# EAGLE board L298BOB (EAGLE 6.1)
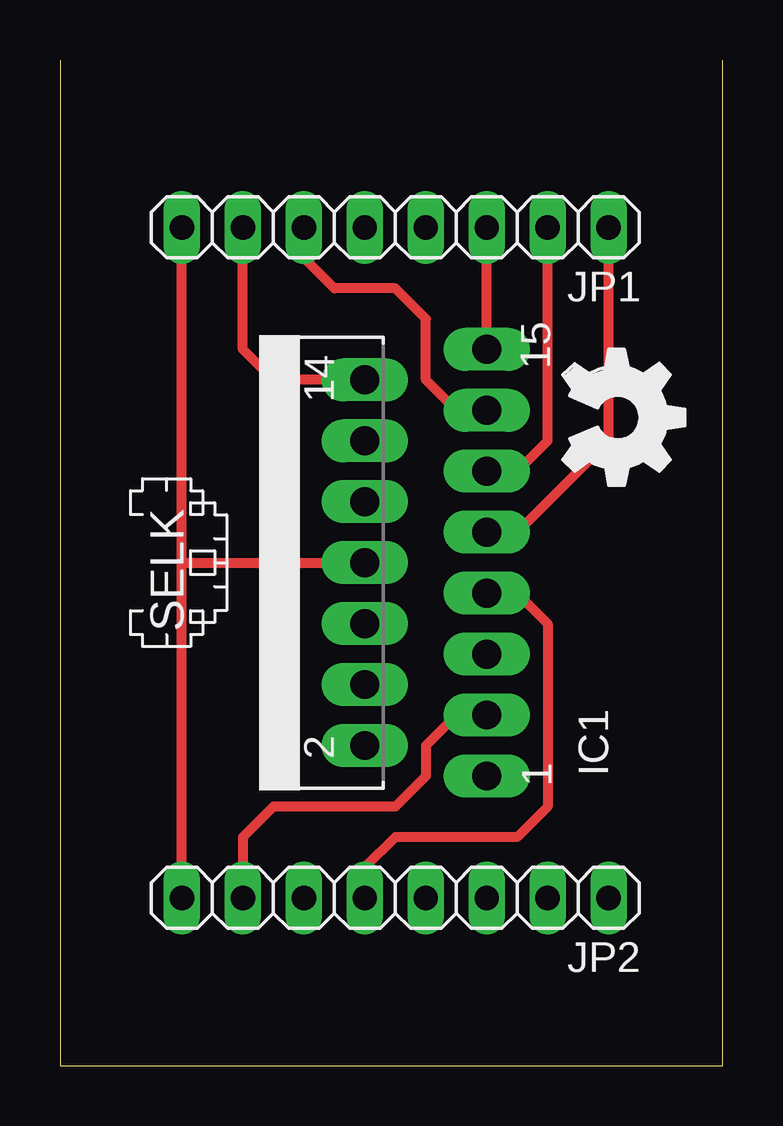
[diagram p0: board, top side]
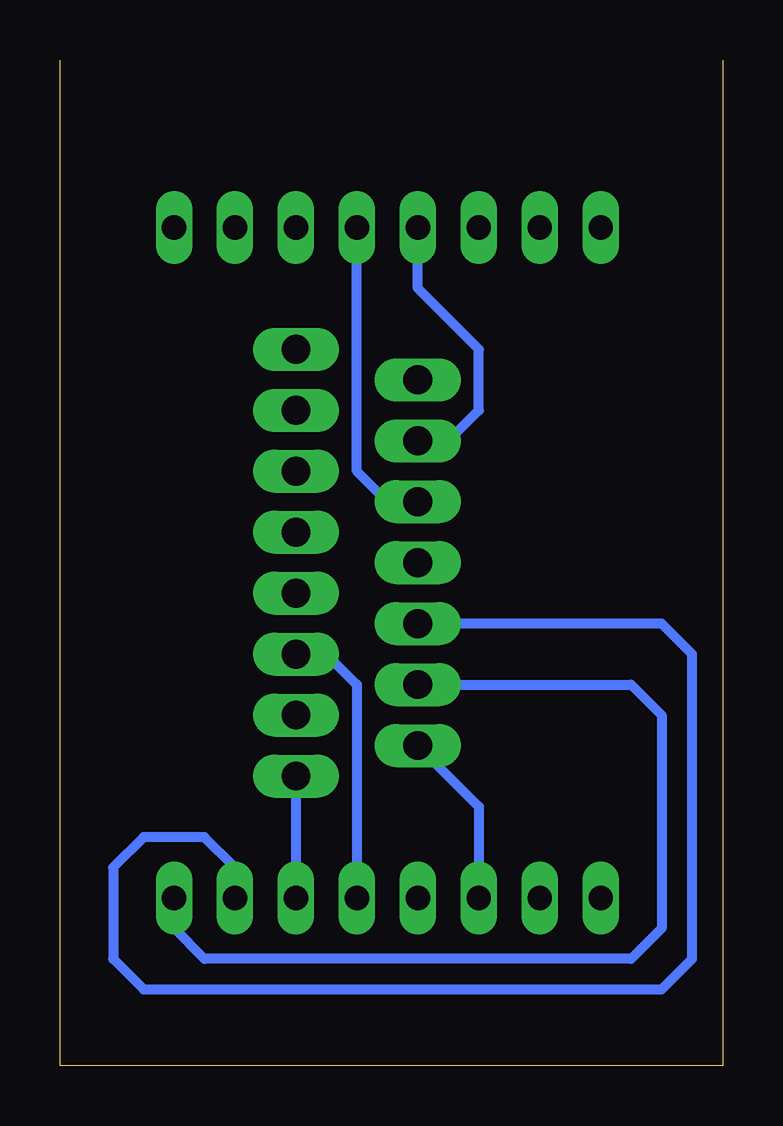
[diagram p1: board, bottom side, seen from below]

Size 27.61 x 41.9 mm. Coordinates in mm from the lower left corner, seen from the top.
Outline: 27.61,41.9 27.61,0 0,0 0,41.9
Copper layers (1*16): Top 0.035mm / dielectric 1.5mm / Bottom 0.035mm
Design rules: minimum track width 16mil, minimum drill 24mil, track to track 16mil, track to pad 16mil, pad to pad 8mil, via to via 8mil, smd to smd 8mil, copper to edge 40mil, drill to drill 8mil, minimum pad ring 10mil, minimum via ring 8mil, stop-mask expansion 4mil, vias tented up to drill 0mil, thermal gap 10mil

## Footprints (pad centres in the part's own frame; a part is rotated, then mirrored left to right if it is on the bottom)
MULTIWATT-15 = drill 1.2 long: 1 -8.89,-7.62; 2 -7.62,-2.54; 3 -6.35,-7.62; 4 -5.08,-2.54; 5 -3.81,-7.62; 6 -2.54,-2.54; 7 -1.27,-7.62; 8 0,-2.54; 9 1.27,-7.62; 10 2.54,-2.54; 11 3.81,-7.62; 12 5.08,-2.54; 13 6.35,-7.62; 14 7.62,-2.54; 15 8.89,-7.62
1X08 = drill 1.016 long: 1 -8.89,0; 2 -6.35,0; 3 -3.81,0; 4 -1.27,0; 5 1.27,0; 6 3.81,0; 7 6.35,0; 8 8.89,0

## Placement (x,y rotation side)
IC1  L298  [MULTIWATT-15]  10.16,20.95 90 top
JP1  [1X08]  13.97,34.92 180 top
JP2  [1X08]  13.97,6.99 180 top
LOGO1  OSHW_LOGO_FILLX0200-NT  [OSHW_FILLX200_NOTEXT]  20.95,29.84 270 top
U$1  SELK02  [SELK02]  4.45,20.95 270 top

## Library data of the parts
IC1 = st-microelectronics; MPN: L298N; OC_FARNELL: 1589425; OC_NEWARK: 32M1527
JP1 JP2 = pinhead
LOGO1 = ohw-logo
U$1 = selk

## Nets
GND: IC1.8 JP1.8 JP2.8
N$1: IC1.4 JP2.1
N$2: IC1.1 JP2.3
N$3: IC1.5 JP2.4
N$4: IC1.7 JP2.5
N$5: IC1.2 JP2.6
N$6: IC1.3 JP2.7
N$7: IC1.9 JP1.1
N$8: IC1.6 JP2.2
N$9: IC1.11 JP1.2
N$10: IC1.15 JP1.3
N$11: IC1.10 JP1.4
N$12: IC1.12 JP1.5
N$13: IC1.13 JP1.6
N$14: IC1.14 JP1.7

## Tracks (layer width: path | path; a pad name or v marks a point on that pad's centre or on a via)
GND
  Top 0.406: JP2.8 5.08,20.95 | 5.08,20.95 JP1.8 | 5.08,20.95 IC1.8
N$1
  Bottom 0.406: IC1.4 3.81,15.88 2.54,14.61 2.54,5.71 3.81,4.45 21.59,4.45 22.86,5.71 JP2.1
N$2
  Bottom 0.406: IC1.1 JP2.3
N$3
  Bottom 0.406: JP2.4 15.24,15.88 16.51,17.14 IC1.5
N$4
  Top 0.406: JP2.5 12.7,8.26 13.97,9.53 19.05,9.53 20.32,10.79 20.32,18.41 19.05,19.68 IC1.7
N$5
  Bottom 0.406: JP2.6 10.16,10.79 IC1.2
N$6
  Top 0.406: 7.62,8.26 JP2.7 7.62,9.53 8.89,10.79 13.97,10.79 15.24,12.06 15.24,13.34 16.51,14.61 IC1.3
N$7
  Top 0.406: JP1.1 22.86,26.04 19.05,22.23 IC1.9
N$8
  Bottom 0.406: JP2.2 20.32,8.26 21.59,9.53 24.13,9.53 25.4,8.26 25.4,4.45 24.13,3.17 2.54,3.17 1.27,4.45 1.27,17.14 2.54,18.41 IC1.6
N$9
  Top 0.406: JP1.2 20.32,26.04 19.05,24.77 IC1.11
N$10
  Top 0.406: IC1.15 JP1.3
N$11
  Bottom 0.406: JP1.4 15.24,24.77 13.97,23.5 IC1.10
N$12
  Bottom 0.406: JP1.5 12.7,32.38 10.16,29.84 10.16,27.3 11.43,26.04 IC1.12
N$13
  Top 0.406: IC1.13 16.51,27.3 15.24,28.57 15.24,31.11 13.97,32.38 11.43,32.38 10.16,33.66 JP1.6
N$14
  Top 0.406: IC1.14 8.89,28.57 7.62,29.84 JP1.7

## Text on the board
Document: GND | AO2 | AO1 | AI2 | AI1 | ASN | AEN | VS | L298 Breakout Board | CC-BY-SA | M.I.E | GND | BO2 | BO1 | BI2 | BI1 | BSN | BEN | VCC